# Altium PCB dcrelay.PcbDoc
Units mil, origin at the board's own origin, x right, y up, seen from the top; angles counter-clockwise.
Board outline 3500 x 3855 mil, 4 copper layers (Top Layer, Middle Layer 1, Middle Layer 2, Bottom Layer), stack 35.634 mil thick; 11 components, 8 nets, 42 pads, 3 vias.
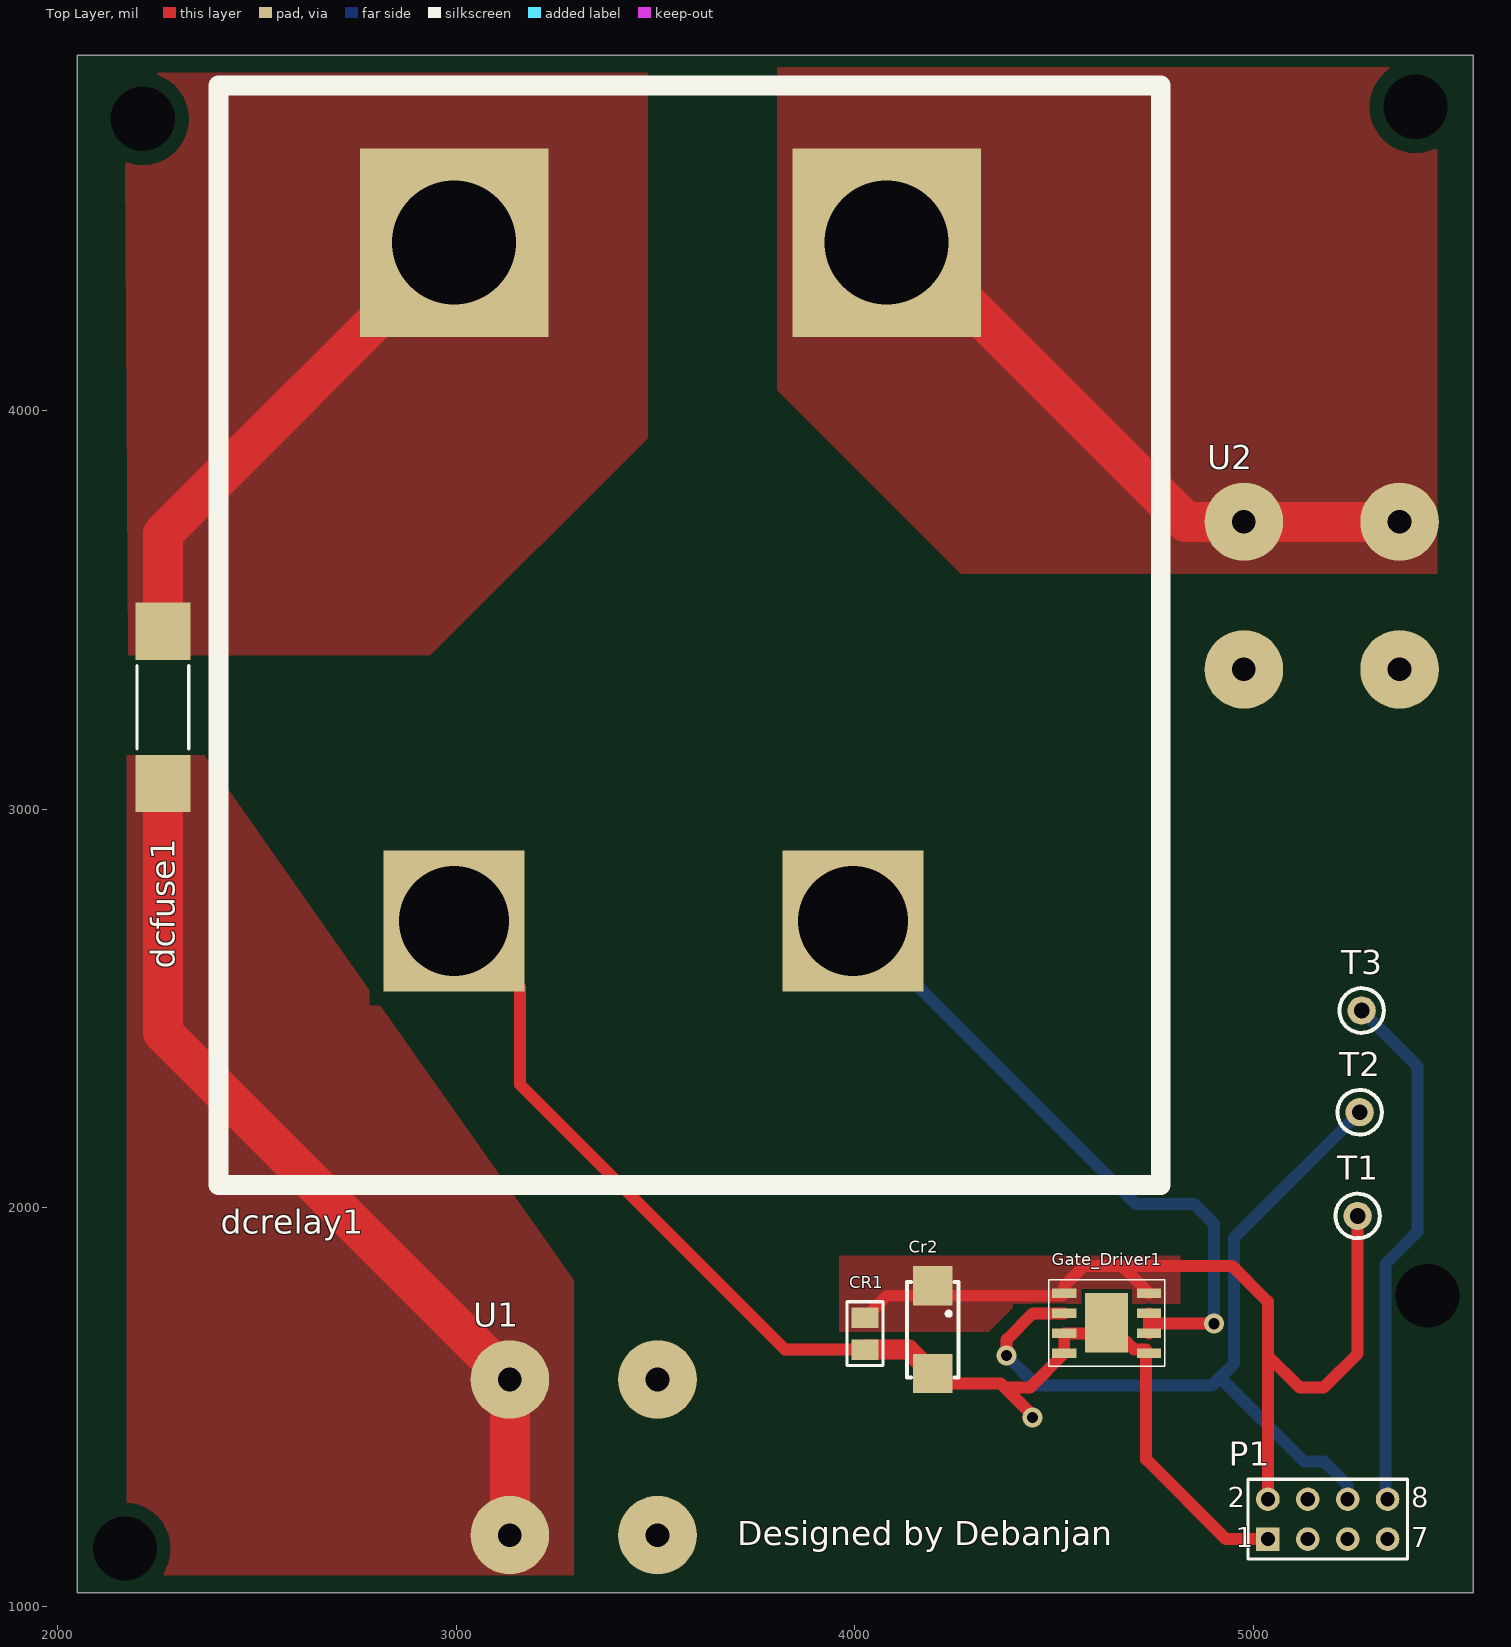
[diagram p0: Top Layer view]
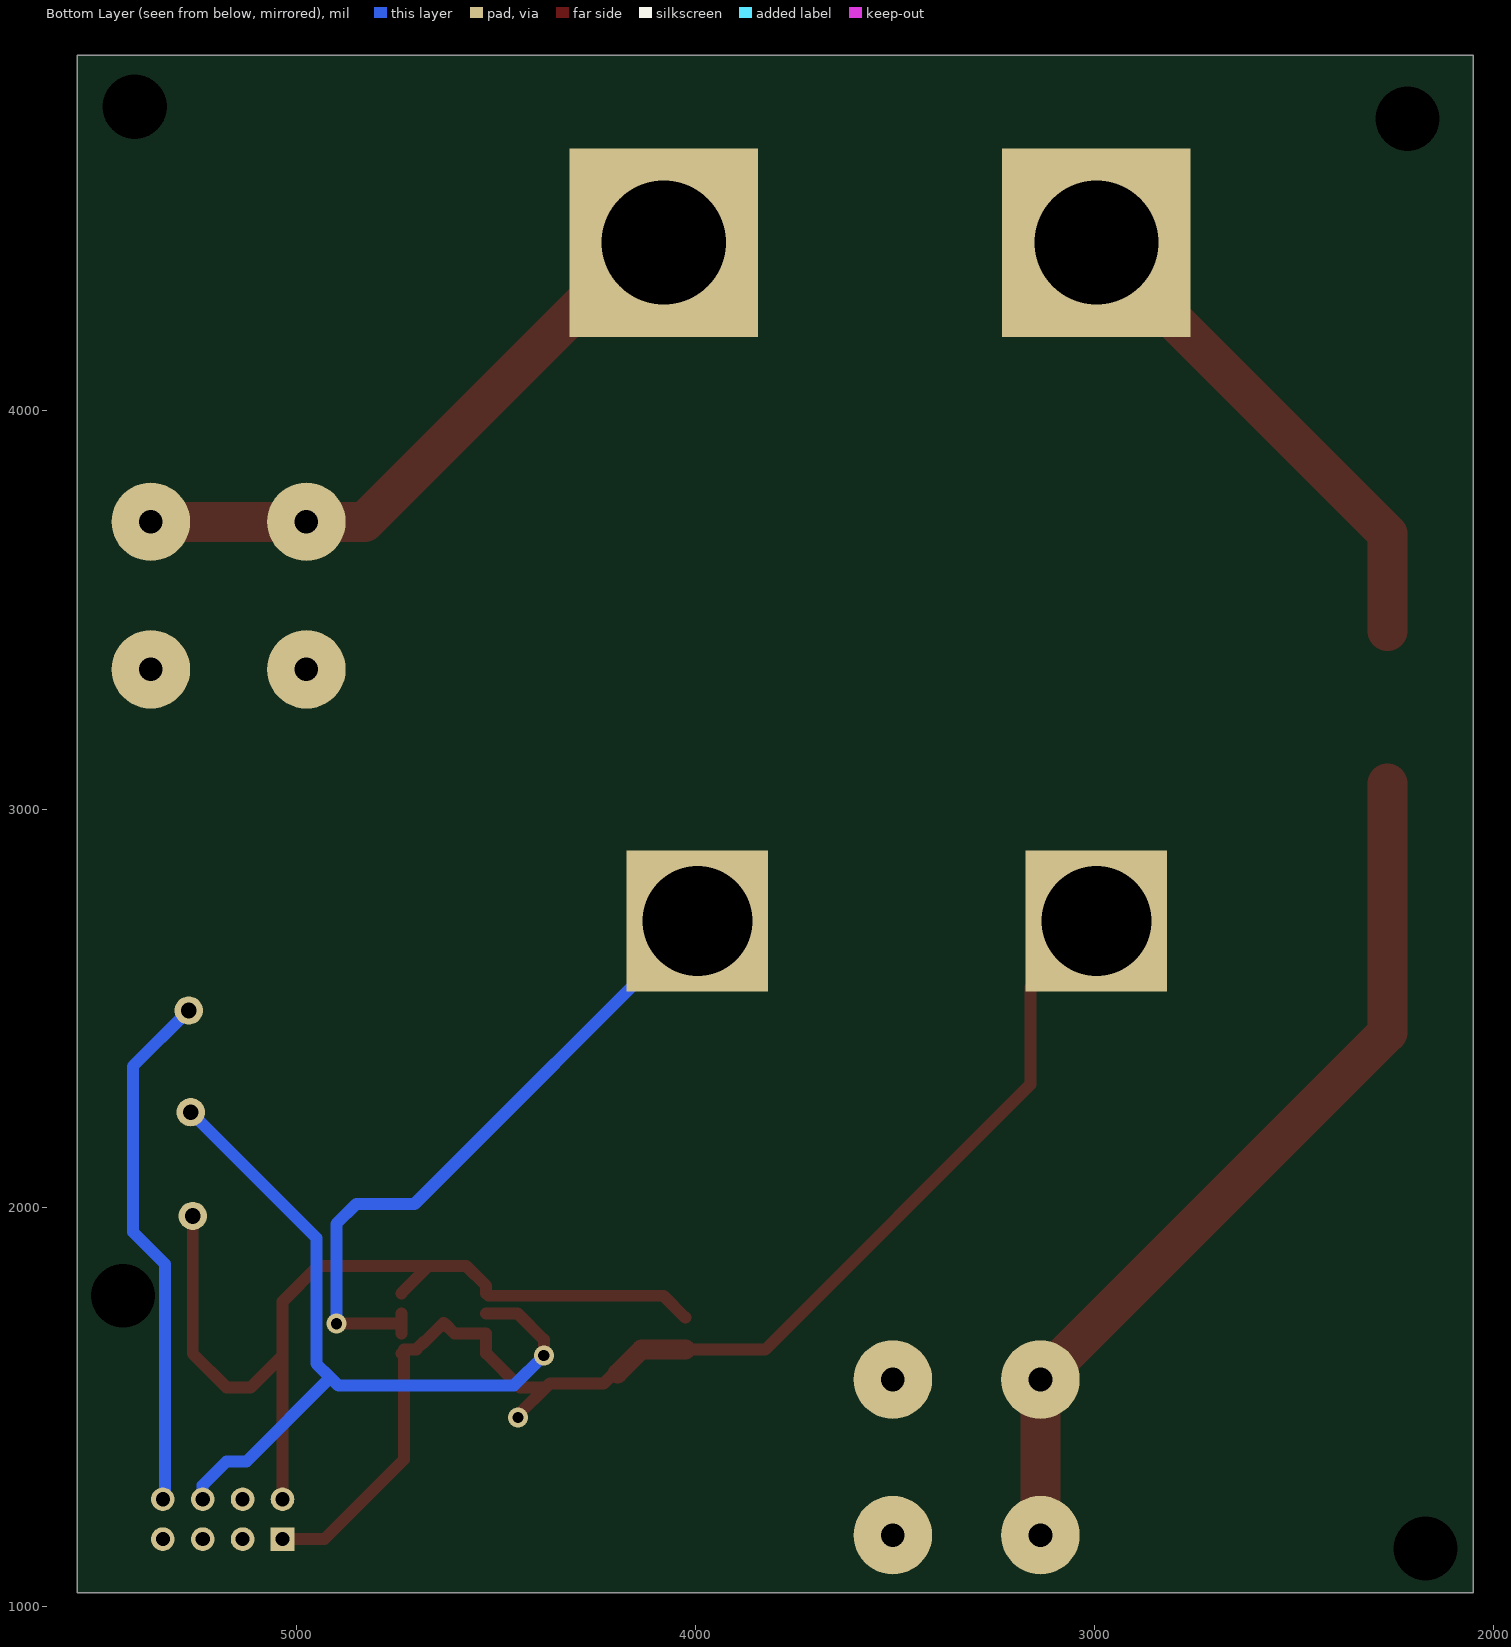
[diagram p1: Bottom Layer view, seen from below]
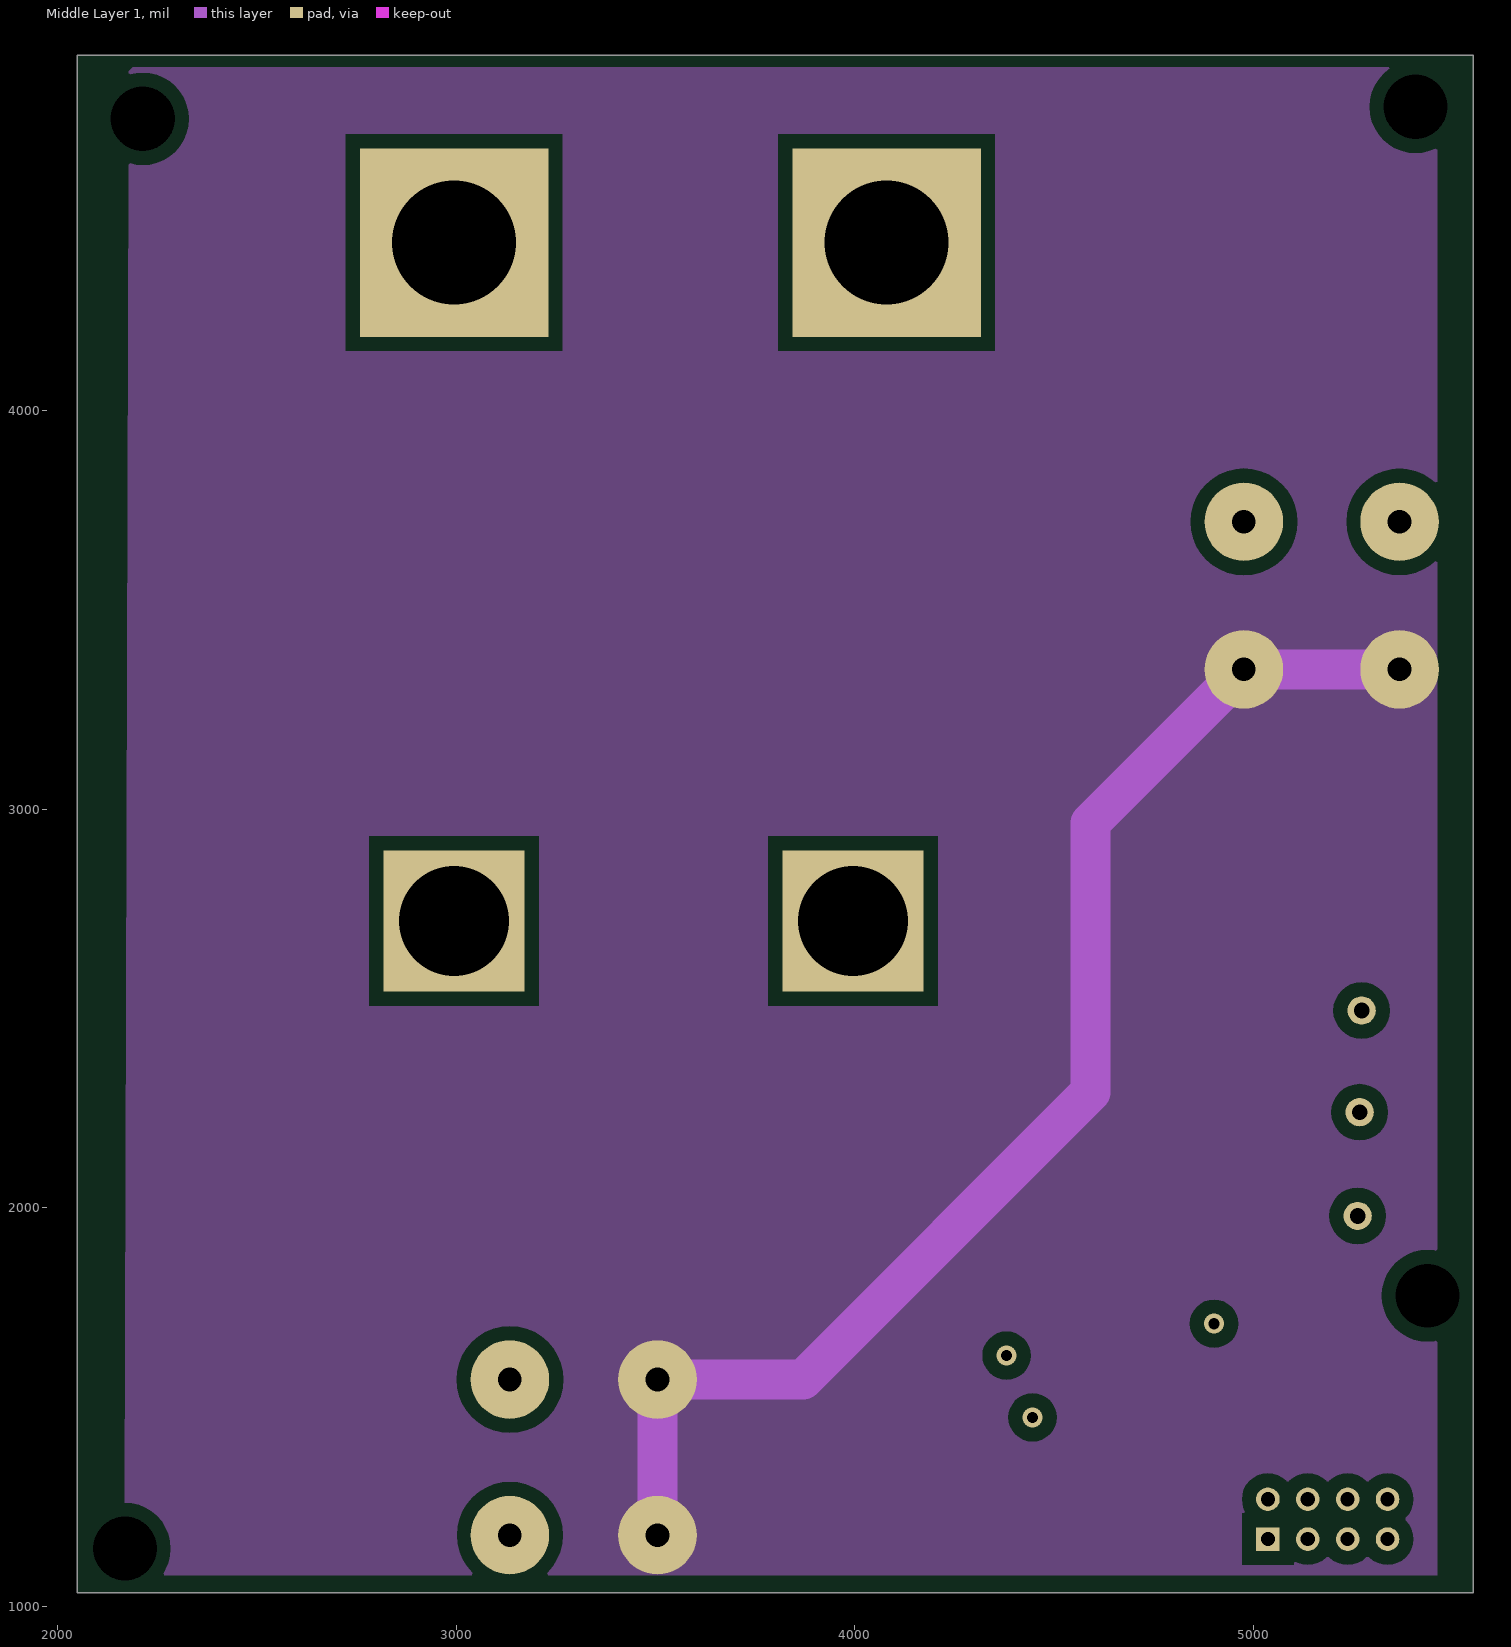
[diagram p2: Middle Layer 1]
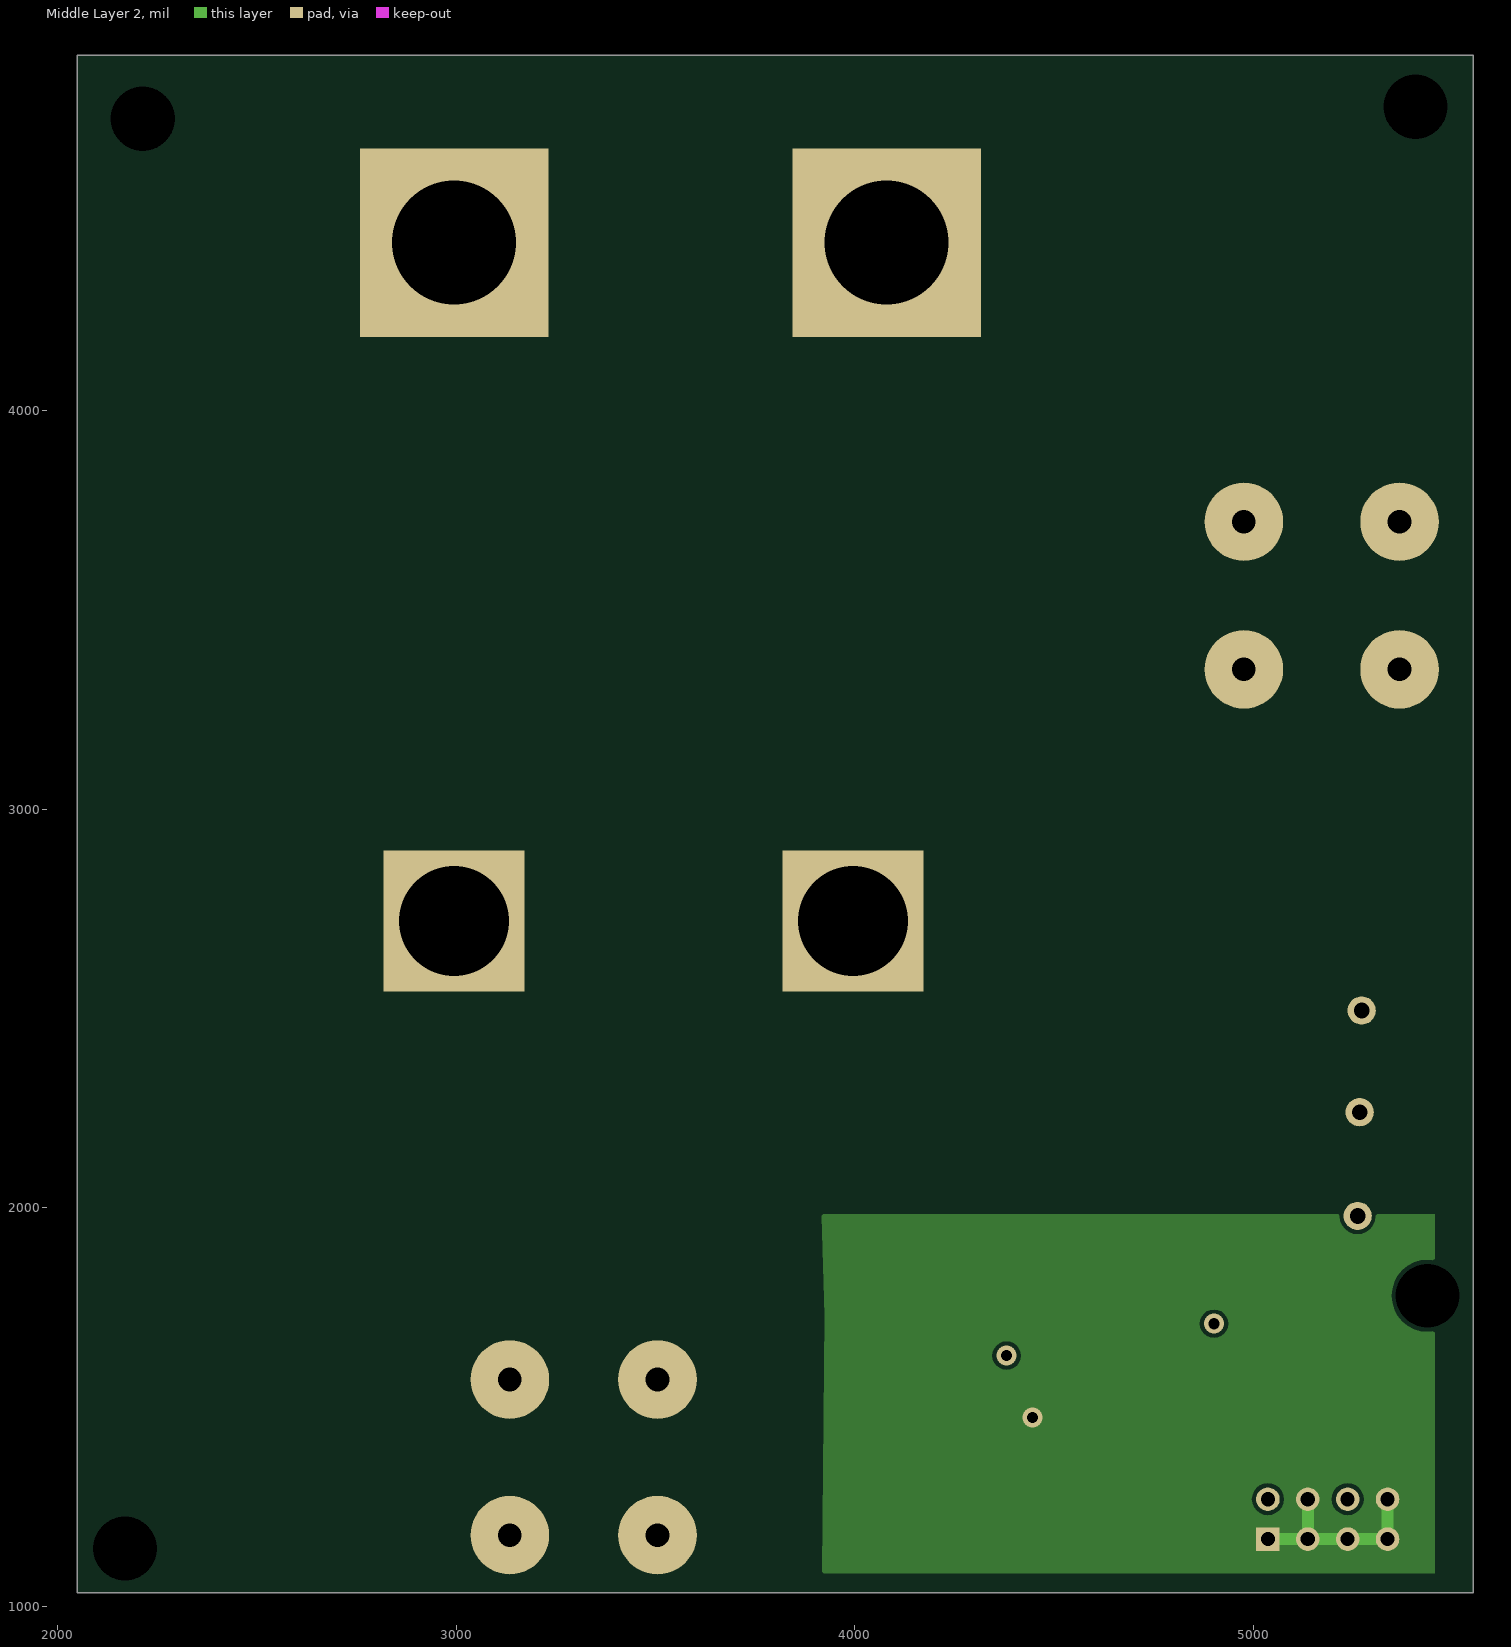
[diagram p3: Middle Layer 2]

## Layer stack, top to bottom
Top Solder: solder mask 0.4, Solder Resist, Dk 3.5
Top Layer: signal copper 1.4
Dielectric 1: core 10, FR-4, Dk 4.2
Middle Layer 1: signal copper 1.417
Dielectric 3: prepreg 10, Dk 4.2
Middle Layer 2: signal copper 1.417
Dielectric 2: core 10, Dk 4.2
Bottom Layer: signal copper 1.4
Bottom Solder: solder mask 0.4, Solder Resist, Dk 3.5

## Board outline
2050,1035 5550,1035 5550,4890 2050,4890

## Design rules (kind name [scope] priority, off if disabled: settings)
Clearance [All] p1: gap=10 ignorepadtopadclearanceinfootprint=FALSE
PlaneConnect [All] p1: planeconnectstyle=Direct reliefexpansion=20 reliefentries=4 reliefconductorwidth=10 reliefairgap=10
PolygonConnect [All] p1: connectstyle=Direct reliefconductorwidth=10 reliefentries=4 polygonreliefangle="90 Angle" airgapwidth=10
RoutingVias [All] p1: holewidth=28 width=50 viastyle="Through Hole" minholewidth=28 minwidth=50 maxholewidth=28 maxwidth=50
SolderMaskExpansion [All] p1: expansion=4
Width [All] p1: maxlimit=100 minlimit=30 preferedwidth=100 minimp=50.000000 maximp=50.000000 favimp=50.000000
29 further rules are at their usual default settings.

## Classes and differential pairs
component class Sheet1: CR1 Cr2 dcfuse1 Gate_Driver1 P1 T1 T2 T3 U2

## Components (designator, comment, footprint, x,y, rotation, side; value= is the part's Value field where it differs from the comment)
CR1 "100nF" Cap_SMD 4025,1690 r180 top
Cr2 "22uF" Cap_tantalum 4200,1710 r180 top
dcfuse1 "dcfuse" dcf 2265,3255 r270 top
dcrelay1 "dcrelay" newdcrelay 2995,4420 r0 top
Gate_Driver1 "IXDN609SI" "Gate driver _low side" 4625,1719.17 r0 top
P1 "Header 4X2" HDR2X4 5035,1170 r0 top (schematic designator P?)
T1 "Test Point" "Test Point" 5260,1980 r0 top
T2 "Test Point" "Test Point" 5265,2240 r0 top
T3 "Test Point" "Test Point" 5270,2495 r0 top
U1 "Connector 60A" newconn60A 1645,875 r0 top
U2 "Connector 60A" newconn60A 4670,5210 r270 top

## Footprints (in the part's own frame and the unit in brackets; to place one, negate y for a bottom-side part, rotate by r counter-clockwise, add the part's x,y. Pads: shape width x height; smd on the part's side, far side on the other; paste and mask are expansions set on the pad)
Cap_SMD [mm]
  rect 1.7x1.3 smd: 1(0,-0.889) 2(0,1.143)
  silkscreen extent -1.14,-1.91 1.14,2.16
Cap_tantalum [mm]
  rect 2.5x2.5 smd: 1(0.127,-2.413) 2(0.127,3.175)
  silkscreen extent -1.52,-2.67 1.78,3.43, body extent -1.65,-2.79 1.91,3.56, height 3.3
dcf [mm]
  rect 3.65x3.5 smd: 1(-4.85,0) 2(4.85,0)
  silkscreen extent -2.65,-1.65 2.65,1.65, body extent -6.3,-1.72 6.3,1.71, height 2.37
"Gate driver _low side" [mm]
  rect 1.55x0.6 smd: 1(-2.55,1.7) 2(-2.55,0.425) 3(-2.55,-0.85) 4(-2.55,-2.125) 5(2.85,-2.125) 6(2.85,-0.85) 7(2.85,0.425) 8(2.85,1.7)
  rect 2.74x3.8 smd: 4(0.15,-0.175)
  silkscreen extent -3.55,-2.95 3.85,2.55
HDR2X4 [mm] "Connector; Header; 4x2 Position"
  rect 1.5x1.5 hole 0.9: 1(0,0)
  round 1.5 hole 0.9: 2(0,2.54) 3(2.54,0) 4(2.54,2.54) 5(5.08,0) 6(5.08,2.54) 7(7.62,0) 8(7.62,2.54)
  silkscreen extent -1.27,-1.27 8.89,3.81
newconn60A [mm]
  round 5 hole 1.5: 1(37.846,7.747) 1(37.846,17.653) 2(47.244,7.747) 2(47.244,17.653)
newdcrelay [mm]
  rect 12x12 hole 7.9: 1(0,0) 2(27.54,0)
  rect 9x9 hole 7: 3(25.4,-43.2) 4(0,-43.2)
  silkscreen extent -15,-60 45,10
"Test Point" [mm]
  round 1.8 hole 1: 1(0,0)
  silkscreen extent -1.42,-1.42 1.42,1.42

## Part data
CR1: library part Cap_SMD
Cr2: library part Cap_tantalum
Gate_Driver1: library part "Gate driver low side"
P1: "Header, 4-Pin, Dual row", LatestRevisionDate=17-Jul-2002, LatestRevisionNote="Re-released for DXP Platform.", Publisher="Altium Limited"

## Free pads (board coordinates)
  round 0 hole 161.42: 4(5405,4760) 9(2215,4730)
  round 0 hole 160: 11(2169.88,1146.39) 13(5435,1780)

## Via types
v1: diameter 50, hole 28, Top Layer to Bottom Layer, 3 vias

## Nets (pads, with @x,y where several pads share a name; then routed paths per layer and width w, separated by ;. In a path a pad name is that pad's centre, name@x,y a point inside that pad or via, vN(x,y) a via of type N, cw(c..) or ccw(c..) an arc to the next point about the centre after c; other vN are vias at no path point)
GND: CR1.2 Cr2.2 dcrelay1.4 Gate_Driver1.3 Gate_Driver1.4 Gate_Driver1.5 P1.1 P1.3 P1.4 P1.5 P1.7 P1.8 T3.1 | length 5088.5
  Top Layer w20: v1@4440,1485 4430,1475 v1(4445,1475)
  Top Layer w30: dcrelay1.4 3160,2554.21 3160,2310 3825,1645 CR1.2 ; Cr2.2@4200,1590 4230,1560 4365,1560 4375,1550 ; v1@4440,1485 4375,1550 ; Gate_Driver1.4@4627.72,1709.09 4604.33,1685.71 Gate_Driver1.3 4524.61,1635.51 4439.09,1550 4375,1550 ; Gate_Driver1.4@4630.91,1712.28 Gate_Driver1.4@4680.67,1662.52 ; Gate_Driver1.4@4681.69,1663.54 4699.53,1645.71 4730,1645.71 Gate_Driver1.5@4730,1635.51 ; Gate_Driver1.5 Gate_Driver1.5@4730,1635.51 ; P1.1 4930,1170 4730,1370 Gate_Driver1.5@4730,1635.51
  Top Layer w50: CR1.2 4135,1645 Cr2.2
  Middle Layer 2 w30: P1.1 P1.3 ; P1.4 P1.3 ; P1.8 P1.7 P1.5 P1.3
  Bottom Layer w30: T3.1 5410,2355 5410,1940 5330,1860 5330,1275 P1.8
NetCR1_1: CR1.1 Cr2.1 Gate_Driver1.1 Gate_Driver1.8 P1.2 T1.1 | length 2342.7
  Top Layer w10: Gate_Driver1.1@4518.5,1780 Gate_Driver1.1
  Top Layer w30: CR1.1 4080,1780 Gate_Driver1.1@4518.5,1780 ; Gate_Driver1.1 4524.61,1804.61 4575,1855 4668.31,1855 ; Gate_Driver1.8 4668.31,1855 ; P1.2 5035,1630 ; T1.1 5260,1635 5175,1550 5115,1550 5035,1630 ; 4668.31,1855 4945,1855 5035,1765 5035,1630
Netdcfuse1_1: dcfuse1.1 dcrelay1.1 | length 1276.4
  Top Layer w100: dcfuse1.1 2265,3690 dcrelay1.1
Netdcfuse1_2: dcfuse1.2 U1.1 | length 2244.4
  Top Layer w100: dcfuse1.2 2265,2440 3135,1570 U1.1@3135,1180
Netdcrelay1_2: dcrelay1.2 U2.1 | length 1596.4
  Top Layer w100: dcrelay1.2@4079.25,4470 4829.25,3720 4975,3720 U2.1@5365,3720
Netdcrelay1_3: dcrelay1.3 Gate_Driver1.6 Gate_Driver1.7 | length 1672.5
  Top Layer w30: Gate_Driver1.6 Gate_Driver1.7 ; 4747.2,1710 v1(4900,1710)
  Bottom Layer w30: dcrelay1.3 4704.21,2010 4850,2010 4900,1960 v1(4900,1710)
NetGate_Driver1_2: Gate_Driver1.2 P1.6 T2.1 | length 2070.1
  Top Layer w30: v1(4380,1630) 4380,1670 4445.91,1735.91 Gate_Driver1.2
  Middle Layer 2 w20: v1@4375,1625 v1(4380,1630)
  Bottom Layer w30: v1(4380,1630) 4455,1555 4895,1555 4915,1575 ; P1.6 5235,1305 5175,1365 5125,1365 4915,1575 ; T2.1 4950,1925 4950,1610 4915,1575
NetU1_2: U1.2 U2.2 | length 3382.7
  Middle Layer 1 w100: U1.2@3505,1180 3505,1570 3870,1570 4590,2290 4590,2965 4975,3350 U2.2@5365,3350

## Polygon pours and split planes (outlines as drawn)
NetCR1_1 on Top Layer "Netcr1_1" (solid, pour order 2): 3960,1880 4815,1880 4815,1760 4395,1760 4395,1750 4335,1690 3960,1690
Netdcrelay1_2 on Top Layer "netu1_2" (solid, pour order 28): 3805,4860 5450,4860 5465,4845 5460,4840 5460,3590 4265,3590 3805,4050
Netdcfuse1_1 on Top Layer "netu1_2" (solid, pour order 30): 2168.8,4845 3480,4845 3480,3930 2935,3385 2178.8,3385
Netdcfuse1_2 on Top Layer "netu1_2" (solid, pour order 32): 2175,3135 2368.4,3135 3295,1818.58 3295,1080 2175,1080
NetU1_2 on Middle Layer 1 "netu1_2" (solid, pour order 26): 2180,4850 2190,4860 5460,4860 5460,1080 5425,1080 2169.7,1080
GND on Middle Layer 2 "gnd" (solid, pour order 36): 3923.76,1730 3916.9,1984.02 5453.76,1984.02 5453.76,1085 3917.95,1085

## Silkscreen, mask and mechanical layers (free items; w line width, h text height)
Top Overlay:
  text "Designed by Debanjan" at 3705,1155 h60
Mechanical 13:
  lines w10: 2060,1040 5540,1040 5540,4885 2060,4885 2060,1040

## Text inside footprints (layer, text, board x,y; h text height)
P1: Top Overlay "8" at 5395,1250 h50; Top Overlay "7" at 5395,1150 h50; Top Overlay "1" at 4955,1150 h50; Top Overlay "2" at 4935,1250 h50